# EAGLE board Control (EAGLE 9.6.2)
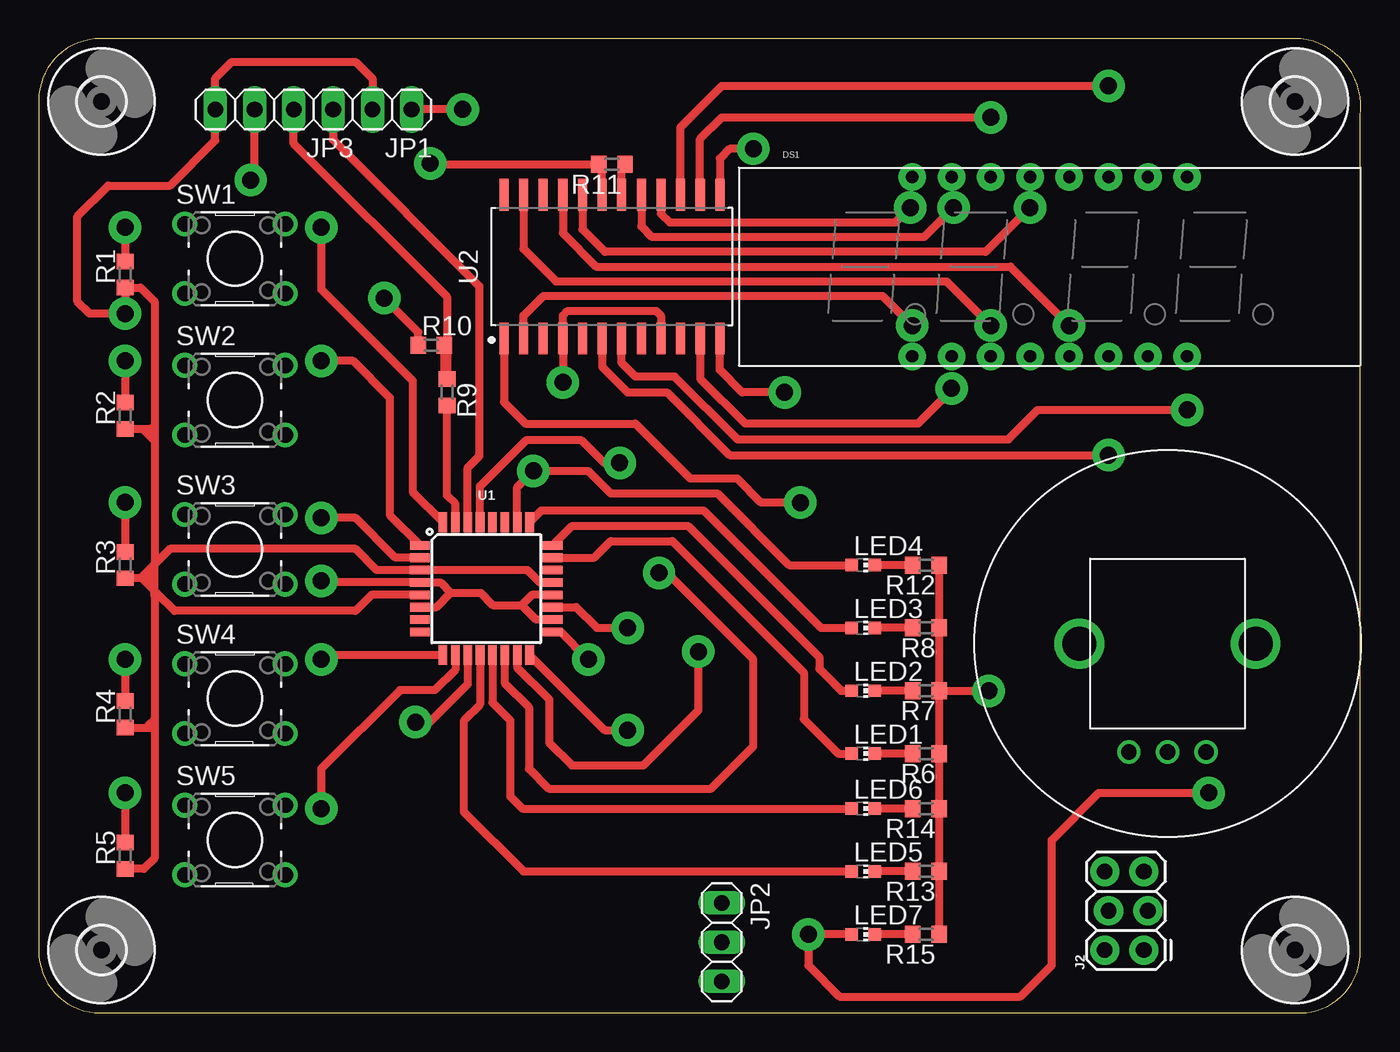
[diagram p0: board, top side]
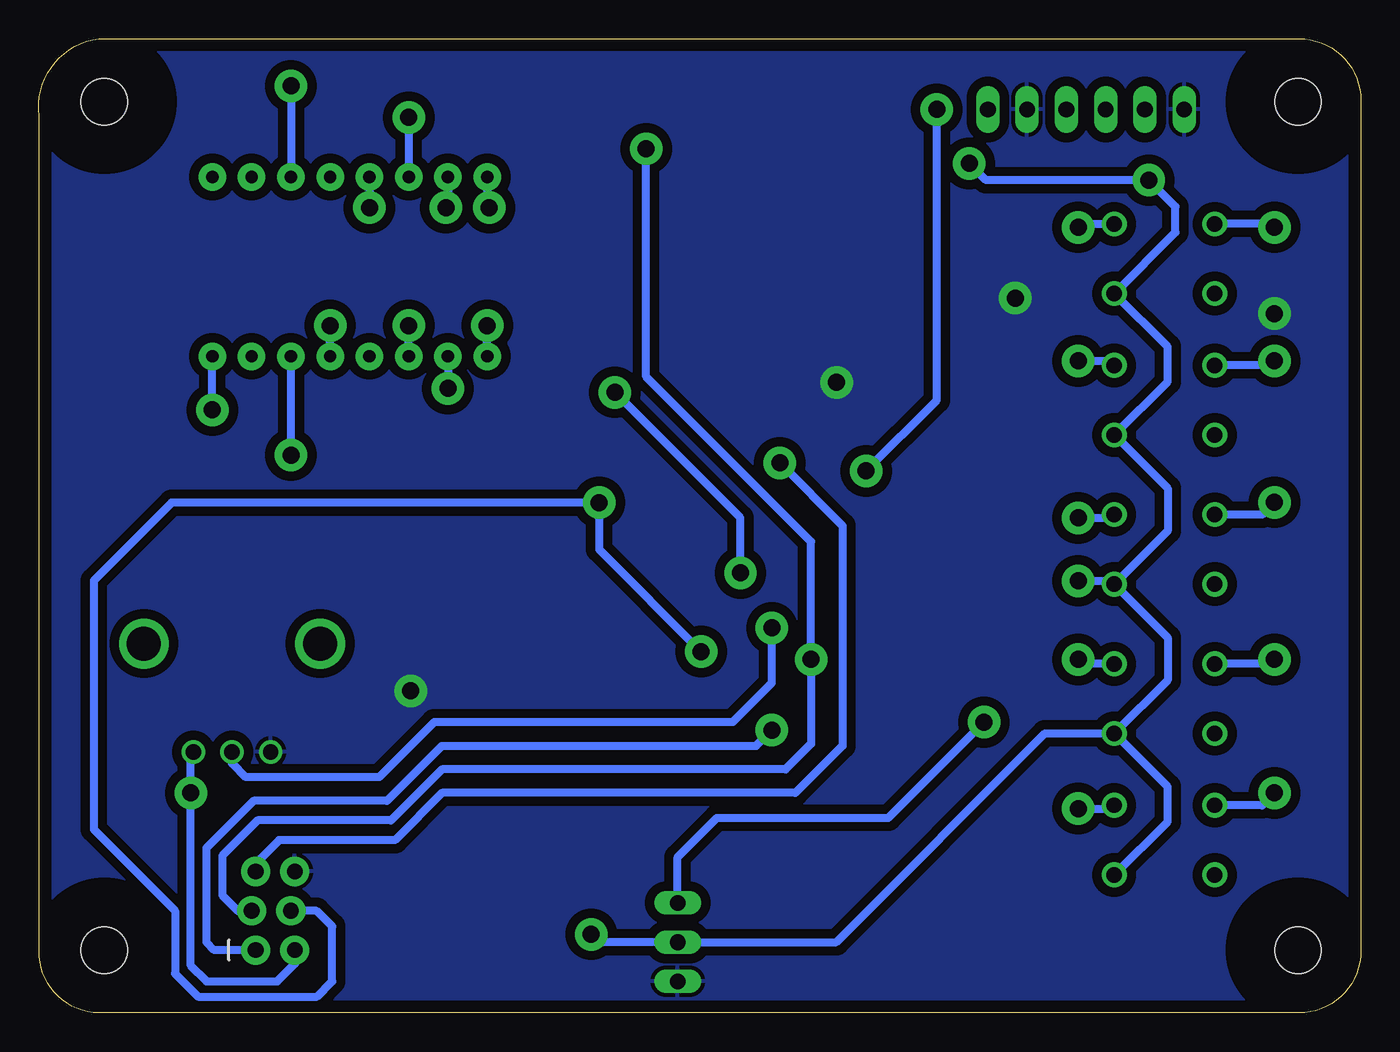
[diagram p1: board, bottom side, seen from below]

Size 85.53 x 63 mm. Coordinates in mm from the lower left corner, seen from the top.
Outline: 81.64,63 4,63 arc90 0,59 0,4 arc90 4,0 81.64,0 arc90 85.5,4 85.5,58 arc90 81.64,63
Copper layers (1*16): Top 0.035mm / dielectric 0.15mm / Bottom 0.035mm
Design rules "LPKF0,1": minimum track width 10mil, minimum drill 0.4mm, track to track 0.1mm, track to pad 0.1mm, pad to pad 0.1mm, via to via 0.1mm, smd to smd 2mil, copper to edge 31.25mil, drill to drill 6mil, minimum pad ring 10mil, minimum via ring 8mil, stop-mask expansion 4mil, vias tented up to drill 0mil, thermal gap 10mil

## Footprints (pad centres in the part's own frame; a part is rotated, then mirrored left to right if it is on the bottom)
TDCG1060M = drill 0.8 pad 1.778: 1 -8.89,-5.8; 2 -6.35,-5.8; 3 -3.81,-5.8; 4 -1.27,-5.8; 5 1.27,-5.8; 6 3.81,-5.8; 7 6.35,-5.8; 8 8.89,-5.8; 9 8.89,5.8; 10 6.35,5.8; 11 3.81,5.8; 12 1.27,5.8; 13 -1.27,5.8; 14 -3.81,5.8; 15 -6.35,5.8; 16 -8.89,5.8
2X3_LOCK = drill 1.016 pad 1.88: 1 0,0.127; 2 0,2.667; 3 2.54,-0.127; 4 2.54,2.413; 5 5.08,0.127; 6 5.08,2.667
1X02 = drill 1.016 long: 1 -1.27,0; 2 1.27,0
1X03 = drill 1.016 long: 1 -2.54,0; 2 0,0; 3 2.54,0
1X04 = drill 1.016 long: 1 -3.81,0; 2 -1.27,0; 3 1.27,0; 4 3.81,0
CHIP-LED0603 = smd 0.8 x 0.8: A 0,-0.75; C 0,0.75
POT_PTV09A-4225F-B103 = drill 1: 1 -2.5,-7; 2 0,-7; 3 2.5,-7 | drill 2.2: A -5.7,0; B 5.7,0
R0603 = smd 1 x 1.1: 1 -0.85,0; 2 0.85,0
B3F-1000 = drill 1 pad 1.6: 1 -3.25,2.25; 2 3.25,2.25; 3 -3.25,-2.25; 4 3.25,-2.25
TQFP32-08 = smd 1.27 x 0.559: 1 -4.293,2.8; 2 -4.293,2; 3 -4.293,1.2; 4 -4.293,0.4; 5 -4.293,-0.4; 6 -4.293,-1.2; 7 -4.293,-2; 8 -4.293,-2.8; 17 4.293,-2.8; 18 4.293,-2; 19 4.293,-1.2; 20 4.293,-0.4; 21 4.293,0.4; 22 4.293,1.2; 23 4.293,2; 24 4.293,2.8 | smd 0.559 x 1.27: 9 -2.8,-4.293; 10 -2,-4.293; 11 -1.2,-4.293; 12 -0.4,-4.293; 13 0.4,-4.293; 14 1.2,-4.293; 15 2,-4.293; 16 2.8,-4.293; 25 2.8,4.293; 26 2,4.293; 27 1.2,4.293; 28 0.4,4.293; 29 -0.4,4.293; 30 -1.2,4.293; 31 -2,4.293; 32 -2.8,4.293
SOIC127P1032X265-24N = smd 2.052 x 0.589: 1 -4.654,6.985; 2 -4.654,5.715; 3 -4.654,4.445; 4 -4.654,3.175; 5 -4.654,1.905; 6 -4.654,0.635; 7 -4.654,-0.635; 8 -4.654,-1.905; 9 -4.654,-3.175; 10 -4.654,-4.445; 11 -4.654,-5.715; 12 -4.654,-6.985; 13 4.654,-6.985; 14 4.654,-5.715; 15 4.654,-4.445; 16 4.654,-3.175; 17 4.654,-1.905; 18 4.654,-0.635; 19 4.654,0.635; 20 4.654,1.905; 21 4.654,3.175; 22 4.654,4.445; 23 4.654,5.715; 24 4.654,6.985
3,0 = hole 3: 0,0

## Placement (x,y rotation side)
DS1  TDCG1060M_COMMONCATHODE  [TDCG1060M]  65.41,48.26 0 top
J2  AVR_SPI_PROG_3X22X3_LOCK  [2X3_LOCK]  71.63,4.06 90 top
JP1  [1X02]  22.86,58.42 180 top
JP2  [1X03]  44.2,4.57 270 top
JP3  [1X04]  15.24,58.42 180 top
LED1  [CHIP-LED0603]  53.34,16.76 270 top
LED2  [CHIP-LED0603]  53.34,20.83 270 top
LED3  [CHIP-LED0603]  53.34,24.89 270 top
LED4  [CHIP-LED0603]  53.34,28.96 270 top
LED5  [CHIP-LED0603]  53.34,9.14 270 top
LED6  [CHIP-LED0603]  53.34,13.21 270 top
LED7  [CHIP-LED0603]  53.34,5.08 270 top
POT1  POT_PTV09A-4225F-B103  [POT_PTV09A-4225F-B103]  73.03,23.88 0 top
R1  10K  [R0603]  5.59,47.75 90 top
R2  10K  [R0603]  5.59,38.61 90 top
R3  10K  [R0603]  5.59,28.96 90 top
R4  10K  [R0603]  5.59,19.3 90 top
R5  10K  [R0603]  5.59,10.16 90 top
R6  330  [R0603]  57.4,16.76 180 top
R7  330  [R0603]  57.4,20.83 180 top
R8  330  [R0603]  57.4,24.89 180 top
R9  3.3K  [R0603]  26.42,40.13 270 top
R10  5K  [R0603]  25.4,43.18 0 top
R11  33K  [R0603]  37.08,54.86 180 top
R12  330  [R0603]  57.4,28.96 180 top
R13  330  [R0603]  57.4,9.14 180 top
R14  330  [R0603]  57.4,13.21 180 top
R15  330  [R0603]  57.4,5.08 180 top
SW1  BUTTON  [B3F-1000]  12.7,48.77 0 top
SW2  BUTTON  [B3F-1000]  12.7,39.62 0 top
SW3  BUTTON  [B3F-1000]  12.7,29.97 0 top
SW4  BUTTON  [B3F-1000]  12.7,20.32 0 top
SW5  BUTTON  [B3F-1000]  12.7,11.18 0 top
U1  ATMEGA328P_TQFP  [TQFP32-08]  28.96,27.43 0 top
U2  MAX7219  [SOIC127P1032X265-24N]  37.08,48.26 90 top
U$2  [3,0]  4.06,4.06 0 top
U$3  [3,0]  81.28,4.06 0 top
U$4  [3,0]  81.28,58.93 0 top
U$5  [3,0]  4.06,58.93 0 top

## Library data of the parts
DS1 = 7-segment display_10mm_LDQ-M282RI
J2 = SparkFun-Connectors
JP1-JP3 = pinhead
LED1-LED7 = led
POT1 = in_pot_PTV09A-4225F-B103
R1-R15 = rcl; SPICEPREFIX: R
SW1-SW5 = pushbutton
U1 = SparkFun-IC-Microcontroller; PROD_ID: IC-09069
U2 = comm_8 segment display driver_MAX7219
U$2-U$5 = holes

## Nets
+5V: J2.2 JP2.2 JP3.3 LED7.A POT1.3 R11.2 SW1.3 SW1.4 SW2.3 SW2.4 SW3.3 SW3.4 SW4.3 SW4.4 SW5.3 SW5.4 U1.4 U1.6 U1.18 U1.20 U2.19
A: DS1.14 U2.14
ADC6: POT1.2 U1.19
ATMEGA_RX: JP3.1 U1.30
ATMEGA_TX: R9.2 U1.31
B: DS1.16 U2.16
C: DS1.13 U2.20
CLK: J2.3 U1.17 U2.13
CS: U1.14 U2.12
D: DS1.3 U2.23
DIG_1: DS1.1 U2.2
DIG_2: DS1.2 U2.11
DIG_3: DS1.6 U2.6
DIG_4: DS1.8 U2.7
E: DS1.5 U2.21
F: DS1.11 U2.15
G: DS1.15 U2.17
GND: J2.6 JP1.2 JP2.3 JP3.4 POT1.1 R1.1 R2.1 R3.1 R4.1 R5.1 R6.1 R7.1 R8.1 R10.1 R12.1 R13.1 R14.1 R15.1 U1.3 U1.5 U1.21 U2.4 U2.9
ISET: R11.1 U2.18
MISO: J2.1 U1.16
MOSI: J2.4 U1.15 U2.1
N$1: LED1.C R6.2
N$2: LED2.C R7.2
N$3: LED3.C R8.2
N$4: LED4.C R12.2
N$5: LED5.C R13.2
N$6: LED6.C R14.2
N$7: LED7.C R15.2
PB0: LED5.A U1.12
PB1: LED6.A U1.13
PC0: LED1.A U1.23
PC1: LED2.A U1.24
PC2: LED3.A U1.25
PC3: JP1.1 LED4.A U1.26
PC4: U1.27
PC5: U1.28
PD2: R1.2 SW1.1 SW1.2 U1.32
PD3: R2.2 SW2.1 SW2.2 U1.1
PD4: R3.2 SW3.1 SW3.2 U1.2
PD5: R4.2 SW4.1 SW4.2 U1.9
PD6: R5.2 SW5.1 SW5.2 U1.10
PD7: JP2.1 U1.11
PI_RX: JP3.2 R9.1 R10.2
RESET: J2.5 U1.29

## Tracks (layer width: path | path; a pad name or v marks a point on that pad's centre or on a via)
+5V  (via drill 1.1 pad 2.1)
  Top 0.508: U1.6 25.73,26.23 26.66,27.16 | 26.66,27.16 25.99,27.83 U1.4 18.4,27.83 v18.29,27.94 | U1.18 32.19,25.43 31.25,26.38 | U1.20 31.91,27.03 31.25,26.38 | 26.66,27.16 28.59,27.16 29.38,26.38 31.25,26.38 | U2.19 36.45,54.65 R11.2 25.4,54.86 v25.33,54.93 | v13.72,53.85 13.97,54.1 JP3.3 | LED7.A v49.78,5.08 49.78,3.08 51.82,1.05 63.5,1.05 65.53,3.08 65.53,11.18 68.58,14.22 v75.69,14.22
  Bottom 0.508: SW3.4 12.5,31.17 12.5,33.92 SW2.4 12.5,40.82 12.5,43.07 SW1.4 12,50.47 12,52.13 v13.72,53.85 24.25,53.85 v25.33,54.93 | SW3.4 12.5,24.27 12.5,21.52 SW4.4 | SW4.4 12.5,14.62 12.5,12.38 SW5.4 | v18.29,27.94 16.17,27.94 SW3.4 | SW4.4 20.43,18.07 33.93,4.57 JP2.2 49.28,4.57 v49.78,5.08 | J2.2 68.96,3.17 70.1,2.03 74.68,2.03 75.69,3.05 v75.69,14.22 75.69,16.71 POT1.3
A  (via drill 1.1 pad 2.1)
  Top 0.508: U2.14 42.8,56.52 44.2,57.91 v61.59,57.91
  Bottom 0.508: v61.59,57.91 DS1.14
ADC6  (via drill 1.1 pad 2.1)
  Top 0.508: U1.19 34.77,26.23 36.11,24.89 v38.1,24.89
  Bottom 0.508: v38.1,24.89 38.1,21.34 40.64,18.8 59.94,18.8 63.5,15.24 72.14,15.24 73.03,16.13 POT1.2
ATMEGA_RX
  Top 0.508: U1.30 27.76,35.26 28.5,36 28.5,47 19.05,56.45 JP3.1
ATMEGA_TX
  Top 0.508: U1.31 26.96,32.92 26.42,33.46 R9.2
B  (via drill 1.1 pad 2.1)
  Top 0.508: U2.16 40.26,51.69 40.83,51.12 55.44,51.12 v56.39,52.07
  Bottom 0.508: DS1.16 56.52,52.16 56.43,52.07 v56.39,52.07
C  (via drill 1.1 pad 2.1)
  Top 0.508: U2.20 35.18,50.67 36.64,49.21 61.28,49.21 v64.14,52.07
  Bottom 0.508: DS1.13 v64.14,52.07
CLK  (via drill 1.1 pad 2.1)
  Top 0.508: U1.17 33.76,24.63 35.54,22.84 v35.56,22.86 | v46.23,55.88 44.7,55.88 44.07,55.24 U2.13
  Bottom 0.508: J2.3 72.64,6.6 73.66,7.62 73.66,10.16 71.37,12.45 62.74,12.45 59.44,15.75 37.21,15.75 35.56,17.4 v35.56,22.86 35.56,30.48 46.23,41.15 v46.23,55.88
CS  (via drill 1.1 pad 2.1)
  Top 0.508: U1.14 30.16,21.33 31.72,19.77 31.72,15.78 32.99,14.51 43.51,14.51 46.23,17.23 46.23,22.86 40.64,28.45 v40.13,28.45 | v48.26,40.13 45.51,40.13 44.07,41.57 U2.12
  Bottom 0.508: v40.13,28.45 40.13,32 v48.26,40.13
D  (via drill 1.1 pad 2.1)
  Top 0.508: U2.23 31.37,49.4 33.47,47.31 58.74,47.31 v61.59,44.45
  Bottom 0.508: DS1.3 v61.59,44.45
DIG_1  (via drill 1.1 pad 2.1)
  Top 0.508: U2.2 31.37,45.09 32.64,46.35 54.61,46.35 v56.52,44.45
  Bottom 0.508: DS1.1 v56.52,44.45
DIG_2  (via drill 1.1 pad 2.1)
  Top 0.508: U2.11 42.8,41.02 45.72,38.1 56.9,38.1 59.05,40.26 v59.05,40.39
  Bottom 0.508: DS1.2 v59.05,40.39
DIG_3  (via drill 1.1 pad 2.1)
  Top 0.508: U2.6 36.45,41.78 38.1,40.13 40.64,40.13 44.7,36.07 v69.22,36.07
  Bottom 0.508: v69.22,36.07 DS1.6
DIG_4  (via drill 1.1 pad 2.1)
  Top 0.508: v74.3,38.99 64.64,38.99 62.74,37.08 45.21,37.08 41.15,41.15 38.61,41.15 37.72,42.04 U2.7
  Bottom 0.508: v74.3,38.99 DS1.8
E  (via drill 1.1 pad 2.1)
  Top 0.508: U2.21 33.91,50.42 36.07,48.26 62.87,48.26 v66.67,44.45
  Bottom 0.508: DS1.5 v66.67,44.45
F  (via drill 1.1 pad 2.1)
  Top 0.508: U2.15 41.53,57.28 44.2,59.94 v69.22,59.94
  Bottom 0.508: v69.22,59.94 DS1.11
G  (via drill 1.1 pad 2.1)
  Top 0.508: U2.17 38.99,50.86 39.69,50.16 57.28,50.16 v59.18,52.07
  Bottom 0.508: DS1.15 59.05,52.2 v59.18,52.07
GND  (via drill 1.1 pad 2.1)
  Top 0.508: U1.21 32.42,27.83 31.62,28.63 U1.3 21.87,28.63 20.5,30 8.5,30 7.5,29 | 6.69,28.11 R3.1 | 7.5,29 6.65,28.15 | U1.5 21.53,27.03 20.5,26 8.8,26 7.65,27.15 | 6.65,28.15 6.69,28.11 | 6.69,28.11 7.5,27.3 | 7.5,38 7.5,46 6.6,46.9 R1.1 v5.59,45.21 3.29,45.21 2.5,46 2.5,51.5 4.5,53.5 8.5,53.5 11.43,56.43 JP3.4 11.43,60.43 12.5,61.5 20.5,61.5 21.59,60.41 JP1.2 | 7.5,38 7.5,37 | 7.5,37 7.5,29 | 7.65,27.15 7.5,27 | R5.1 6.81,9.31 7.5,10 7.5,18.3 | 7.5,27 7.5,19 | 7.5,19 7.5,18.3 | R4.1 7.35,18.45 | 7.5,19 7.15,18.65 7.35,18.45 | 7.35,18.45 7.5,18.3 | 7.65,27.15 7.5,27.3 | 7.5,27.3 7.5,28 | 7.5,28 7.5,29 | 6.65,28.15 7.35,28.15 7.5,28 | 7.5,27 7.5,27.3 | 7.5,38 7.26,37.76 R2.1 6.74,37.76 7.5,37 | R10.1 24.55,44.03 v22.35,46.23 | R12.1 R8.1 R7.1 | R7.1 R6.1 R14.1 R13.1 R15.1 | R7.1 v61.47,20.83 | U2.9 40.26,45.09 39.94,45.4 34.23,45.4 33.91,45.09 U2.4 v33.91,40.77
  pour Bottom (isolate 0.61): 0,0 0,63 85.5,63 85.5,0
ISET
  Top 0.508: U2.18 37.72,54.65 R11.1
MISO  (via drill 1.1 pad 2.1)
  Top 0.508: U1.16 36.61,18.29 v38.1,18.29
  Bottom 0.508: v38.1,18.29 39.12,17.27 59.44,17.27 62.99,13.72 71.63,13.72 74.68,10.67 74.68,4.57 74.17,4.06 J2.1
MOSI  (via drill 1.1 pad 2.1)
  Top 0.508: U1.15 30.96,22.33 33.02,20.27 33.02,17.48 34.5,16 39.12,16 42.67,19.56 v42.67,23.37 | U2.1 30.1,39.5 31.5,38.1 38.61,38.1 42.16,34.54 45.19,34.54 46.74,33 v49.28,33
  Bottom 0.508: v42.67,23.37 49.28,29.97 v49.28,33 76.93,33 81.97,27.96 81.97,11.86 76.71,6.6 76.71,2.54 75.22,1.05 67.53,1.05 66.55,2.03 66.55,5.59 67.56,6.6 J2.4
N$1
  Top 0.508: R6.2 LED1.C
N$2
  Top 0.508: R7.2 LED2.C
N$3
  Top 0.508: R8.2 LED3.C
N$4
  Top 0.508: R12.2 LED4.C
N$5
  Top 0.508: R13.2 LED5.C
N$6
  Top 0.508: R14.2 LED6.C
N$7
  Top 0.508: R15.2 LED7.C
PB0
  Top 0.508: U1.12 28.56,19.94 27.5,18.88 27.5,13 31.36,9.14 LED5.A
PB1
  Top 0.508: U1.13 29.36,20.06 30.5,18.92 30.5,14 31.29,13.21 LED6.A
PC0
  Top 0.508: U1.23 35.93,29.43 37,30.5 41,30.5 49.5,22 49.5,19 51.74,16.76 LED1.A
PC1
  Top 0.508: U1.24 34.52,31.5 42,31.5 50.5,23 50.5,22.25 51.92,20.83 LED2.A
PC2
  Top 0.508: U1.25 32.53,32.5 43,32.5 50.61,24.89 LED3.A
PC3  (via drill 1.1 pad 2.1)
  Top 0.508: U1.26 30.96,34 v32,35.05 35.54,35.05 37,33.59 43.91,33.59 48.54,28.96 LED4.A | v27.43,58.42 JP1.1
  Bottom 0.508: v32,35.05 27.43,39.62 27.43,46.92 v27.43,58.42
PD2  (via drill 1.1 pad 2.1)
  Top 0.508: U1.32 24.2,33.68 24.2,40.87 18.29,46.78 v18.29,50.8 | v5.59,50.8 R1.2
  Bottom 0.508: v18.29,50.8 18.07,51.02 SW1.2 | v5.59,50.8 5.81,51.02 SW1.1
PD3  (via drill 1.1 pad 2.1)
  Top 0.508: U1.1 22.71,32.18 22.71,39.79 20.34,42.16 v18.29,42.16 | v5.59,42.16 R2.2
  Bottom 0.508: v18.29,42.16 16.24,42.16 SW2.2 | v5.59,42.16 5.88,41.87 SW2.1
PD4  (via drill 1.1 pad 2.1)
  Top 0.508: v5.59,33.02 R3.2 | v18.29,32 20.5,32 23.07,29.43 U1.2
  Bottom 0.508: v5.59,33.02 6.39,32.22 SW3.1 | v18.29,32 16.17,32 SW3.2
PD5  (via drill 1.1 pad 2.1)
  Top 0.508: v5.59,22.86 R4.2 | U1.9 18.57,23.14 v18.29,22.86
  Bottom 0.508: v5.59,22.86 5.88,22.57 SW4.1 | SW4.2 18,22.57 v18.29,22.86
PD6  (via drill 1.1 pad 2.1)
  Top 0.508: v5.59,14.22 R5.2 | U1.10 26.96,22.2 25.63,20.87 23.37,20.87 18.29,15.79 v18.29,13.21
  Bottom 0.508: v5.59,14.22 6.39,13.43 SW5.1 | v18.29,13.21 16.17,13.21 SW5.2
PD7  (via drill 1.1 pad 2.1)
  Top 0.508: U1.11 27.76,21.26 25.3,18.8 v24.38,18.8
  Bottom 0.508: v24.38,18.8 30.57,12.61 41.66,12.61 44.2,10.07 JP2.1
PI_RX
  Top 0.508: R10.2 26.25,41.15 R9.1 26.42,46.31 16.51,56.22 JP3.2
RESET  (via drill 1.1 pad 2.1)
  Top 0.508: U1.29 28.56,34.06 31.52,37.02 35.12,37.02 36.58,35.56 v37.59,35.56
  Bottom 0.508: v37.59,35.56 33.53,31.5 33.53,17.27 36.58,14.22 59.44,14.22 62.48,11.18 69.98,11.18 71.5,9.65 J2.5